# EAGLE board ebook-reader_v54 (EAGLE 9.7.0)
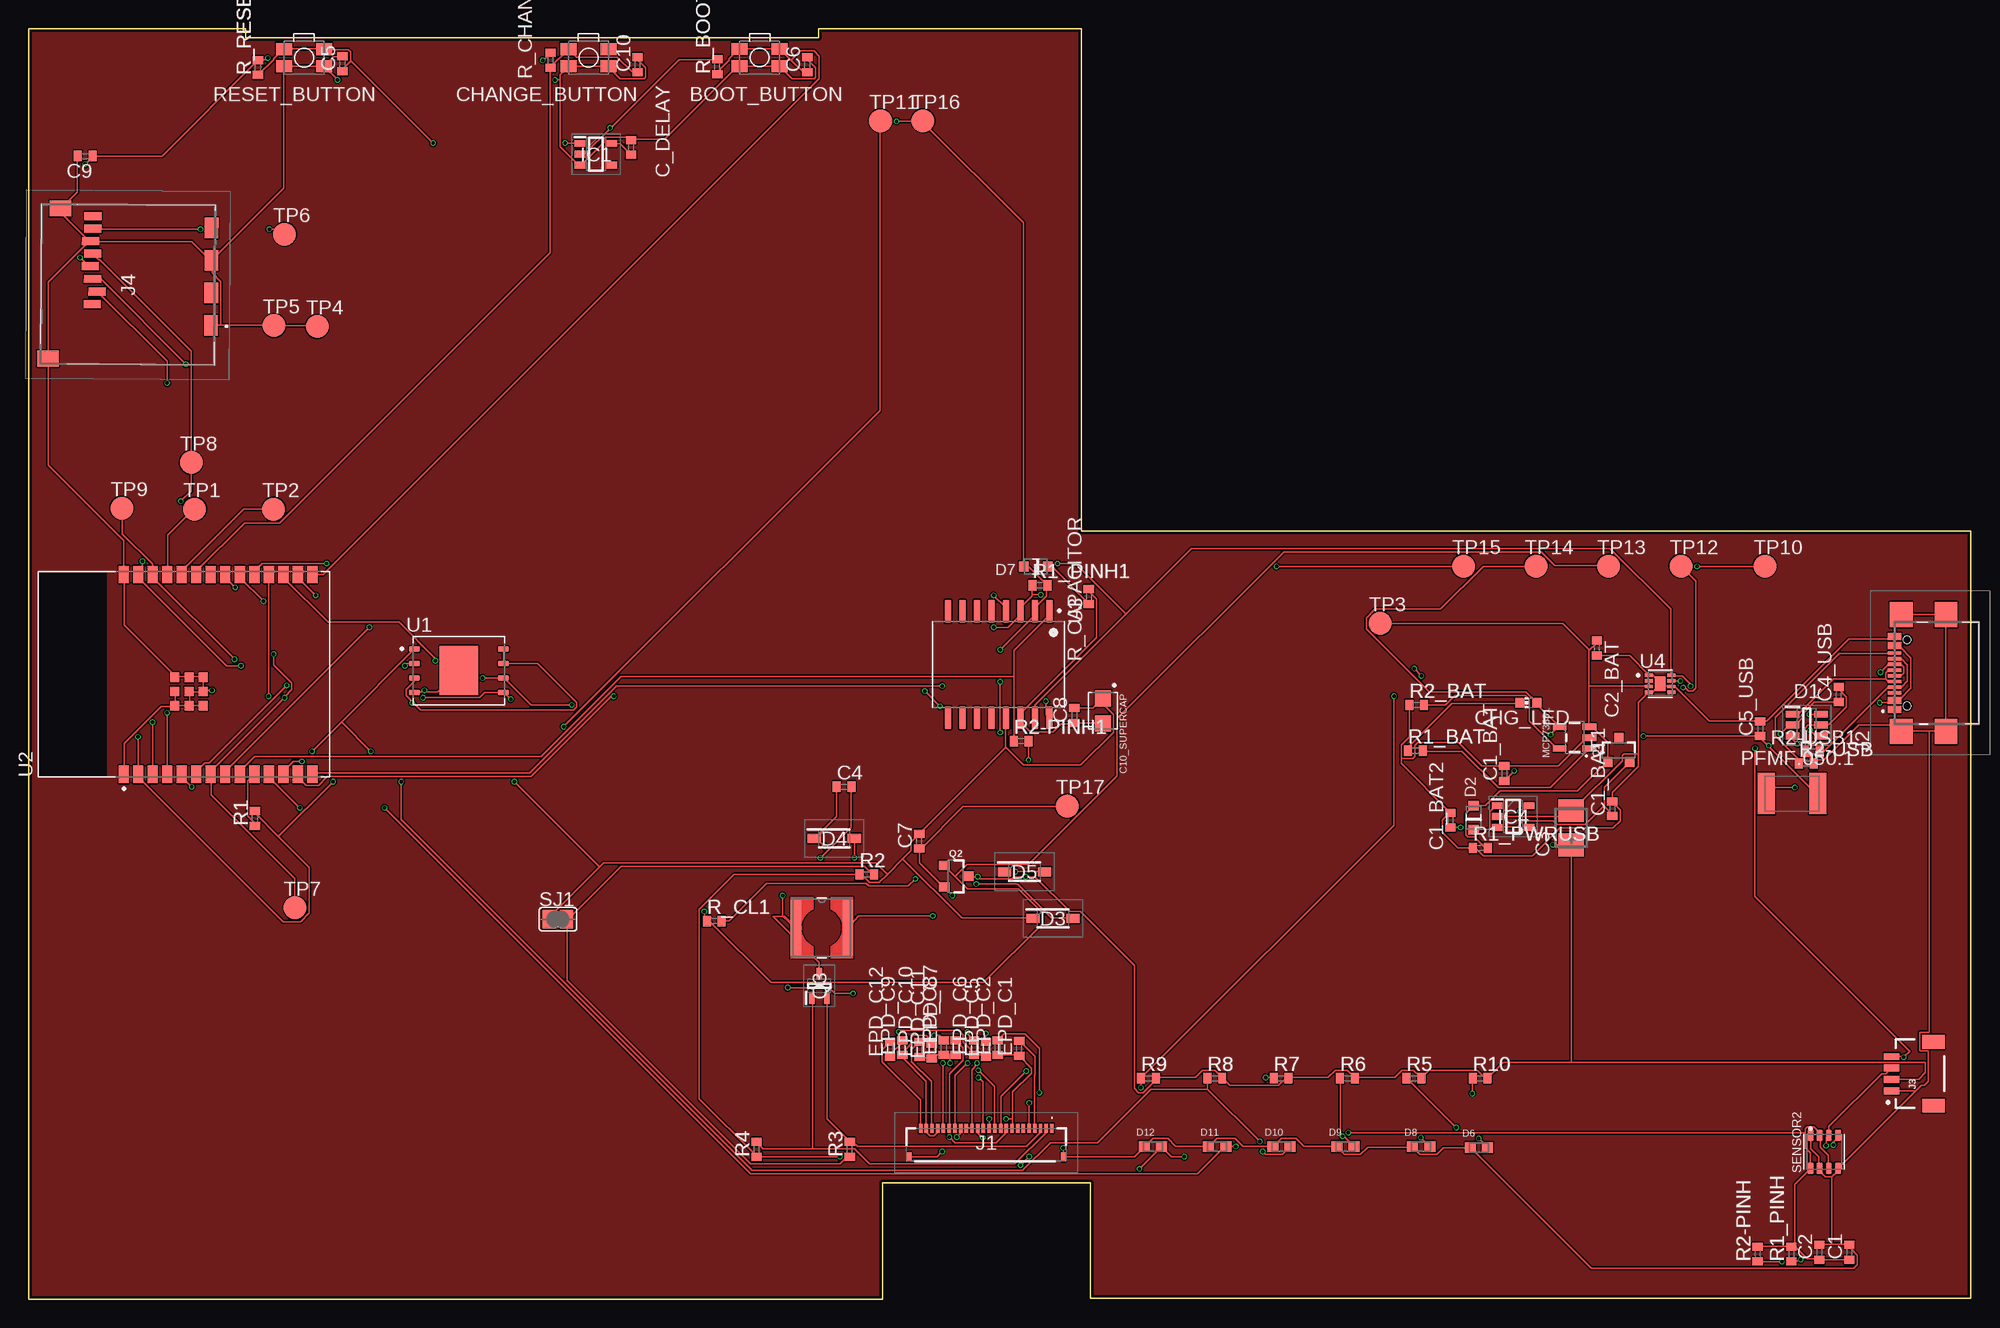
[diagram p0: board, top side]
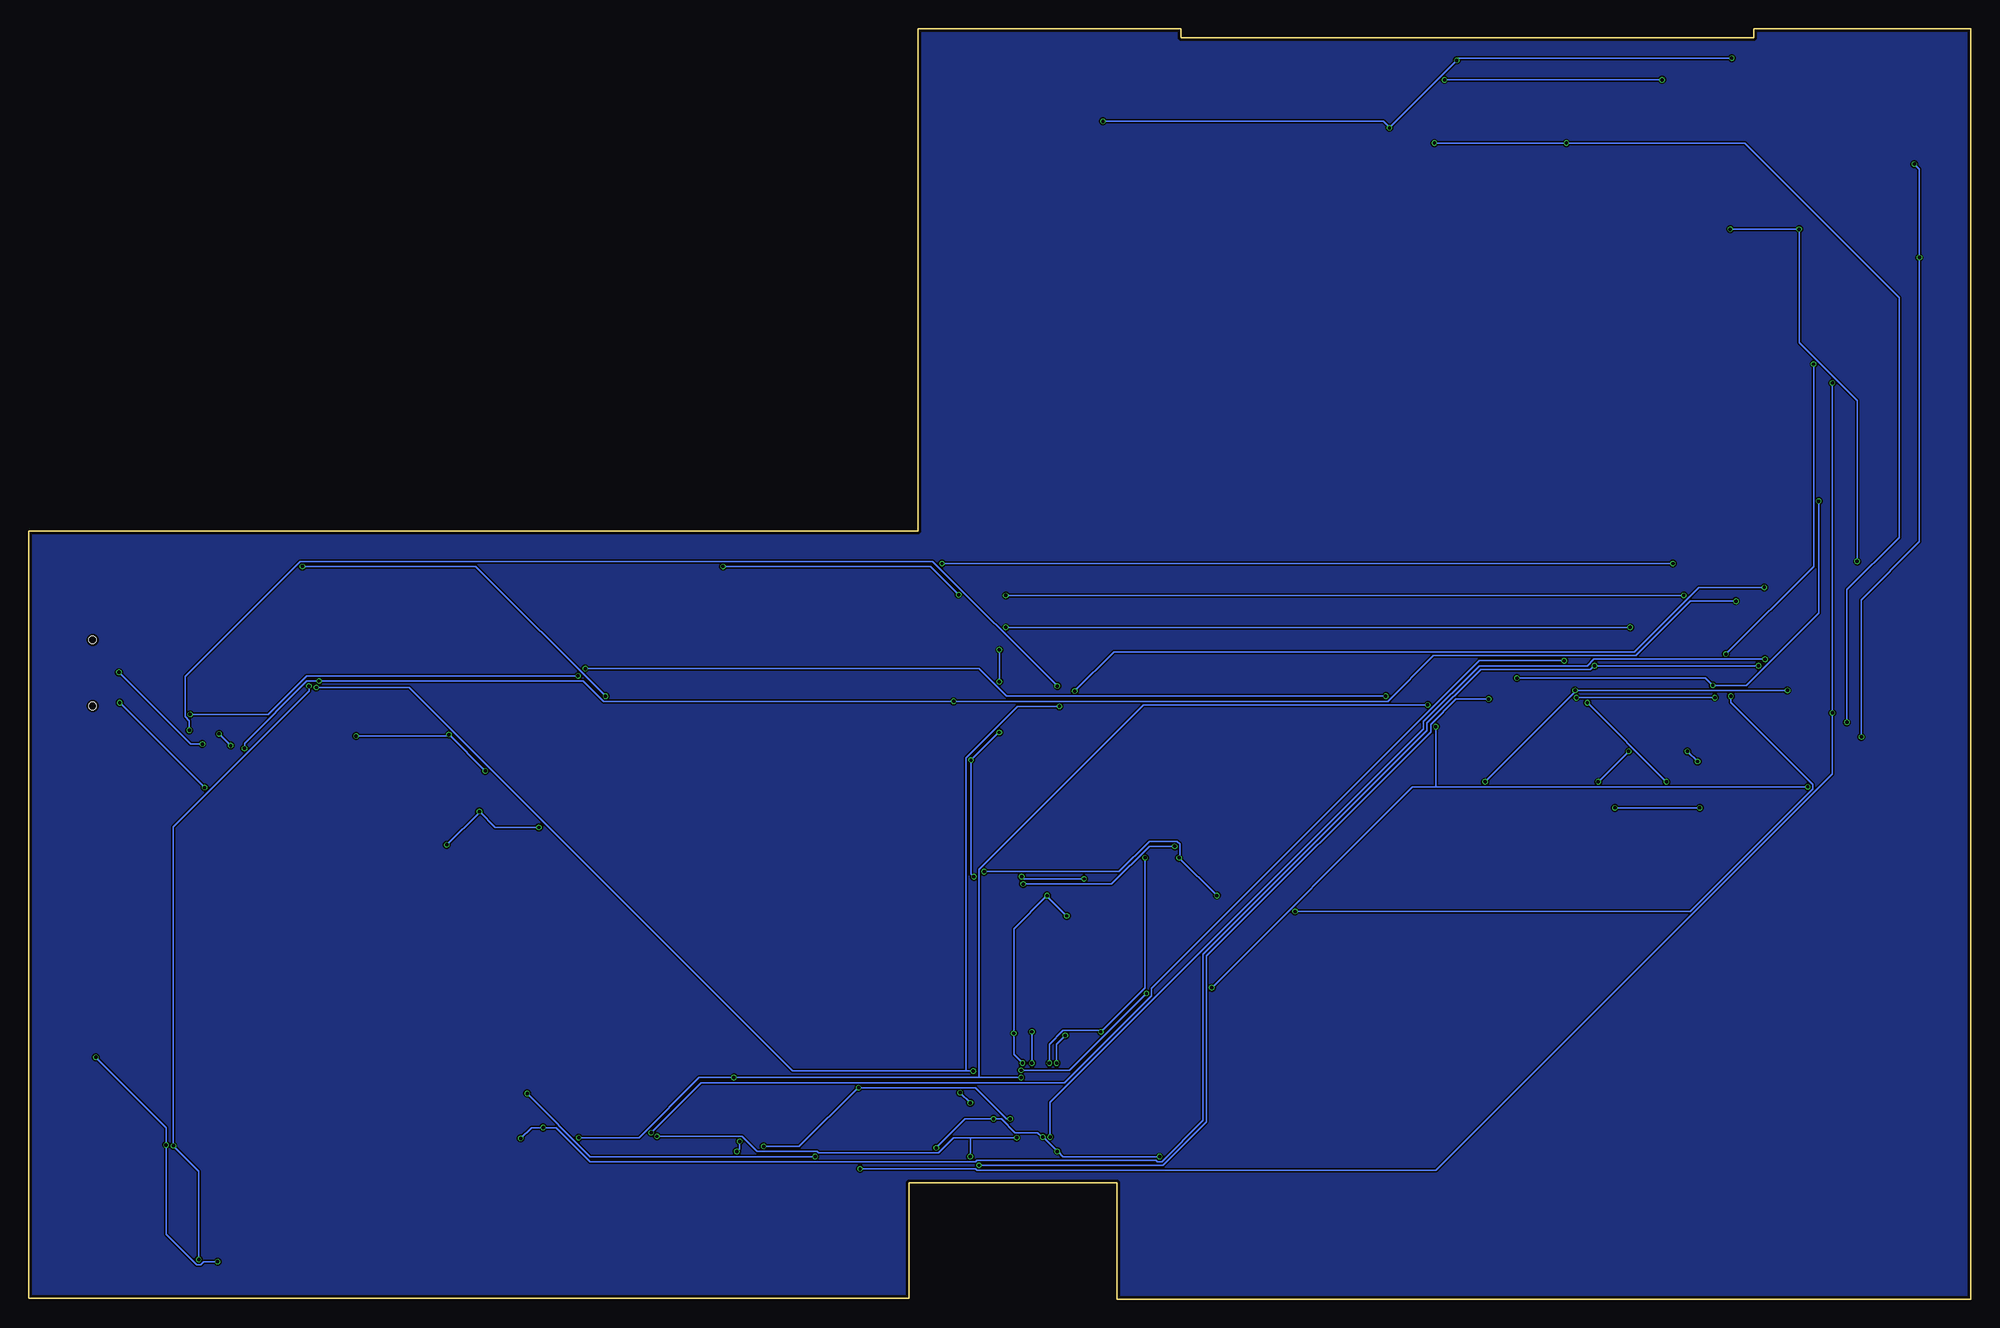
[diagram p1: board, bottom side, seen from below]

Size 170.1 x 111.3 mm. Coordinates in mm from the lower left corner, seen from the top.
Outline: 0,111.3 0,0 74.8,0 74.8,10.2 93,10.2 93,0.1 170.1,0.1 170.1,67.3 92.2,67.3 92.2,111.3 69.2,111.3 69.2,110.5 19.01,110.5 19.01,111.3 0,111.3
Copper layers (1*16): Top 0.035mm / dielectric 1.6mm / Bottom 0.035mm
Design rules "jlcpcb-2layers.dru": minimum track width 5mil, minimum drill 0.3mm, track to track 5mil, track to pad 5mil, pad to pad 5mil, via to via 5mil, smd to smd 5mil, copper to edge 0.2mm, drill to drill 6mil, minimum pad ring 10mil, minimum via ring 3mil, stop-mask expansion 4mil, vias tented up to drill 0mil, thermal gap 10mil
Net classes: 1 Power: width 0.3 mm; 2 Rest: width 0.15 mm

## Footprints (pad centres in the part's own frame; a part is rotated, then mirrored left to right if it is on the bottom)
MYBUTTON = smd 1.4 x 1.05: 1 1.75,0.75; 2 -1.75,0.75; 3 -1.75,-0.75; 4 1.75,-0.75
EAGLE-LTSPICE_C0402 = smd 0.7 x 0.9: 1 -0.65,0; 2 0.65,0
RCL_CT3528 = smd 2 x 2.2: + -1.5,0; - 1.5,0
CAPCP3225X100N = smd 1.4 x 1.4: 1 -1.1,0; 2 1.1,0
ADAFRUIT_CHIP-LED0603 = smd 0.8 x 0.8: A 0,-0.75; C 0,0.75
SOT95P280X145-6N = smd 1.2 x 0.6: 1 -1.25,0.95; 2 -1.25,0; 3 -1.25,-0.95; 4 1.25,-0.95; 5 1.25,0; 6 1.25,0.95
ESP32_WROVER_AVX---SD0805S020S1R0_AVX_SD0805S020S1R0_0 = smd 0.8 x 0.9: 1 -1.05,0; 2 1.05,0
SOD3716X135N = smd 1.15 x 0.8: 1 -1.75,0; 2 1.75,0
DIOC1608X36N = smd 0.97 x 0.94: 1 -0.75,0; 2 0.75,0
SOT95P280X125-5N = smd 0.9 x 0.6: 1 -1.4,0.95; 2 -1.4,0; 3 -1.4,-0.95; 4 1.4,-0.95; 5 1.4,0.95
SOT95P280X120-5N = smd 0.9 x 0.6: 1 -1.4,0.95; 2 -1.4,0; 3 -1.4,-0.95; 4 1.4,-0.95; 5 1.4,0.95
FH34SRJ24S05SH99 = smd 0.3 x 0.8: 1 5.75,1.45; 2 5.25,1.45; 3 4.75,1.45; 4 4.25,1.45; 5 3.75,1.45; 6 3.25,1.45; 7 2.75,1.45; 8 2.25,1.45; 9 1.75,1.45; 10 1.25,1.45; 11 0.75,1.45; 12 0.25,1.45; 13 -0.25,1.45; 14 -0.75,1.45; 15 -1.25,1.45; 16 -1.75,1.45; 17 -2.25,1.45; 18 -2.75,1.45; 19 -3.25,1.45; 20 -3.75,1.45; 21 -4.25,1.45; 22 -4.75,1.45; 23 -5.25,1.45; 24 -5.75,1.45 | smd 0.4 x 0.8: MP1 6.75,-1.05; MP2 -6.75,-1.05
SAMACSYS_PARTS_USB4110GFA = smd 0.3 x 1.15: A1 -3.35,3.678; A4 -2.55,3.678; A5 -1.25,3.678; A6 -0.25,3.678; A7 0.25,3.678; A8 1.25,3.678; A9 2.55,3.678; A12 3.35,3.678; B1 3.05,3.678; B4 2.25,3.678; B5 1.75,3.678; B6 0.75,3.678; B7 -0.75,3.678; B8 -1.75,3.678; B9 -2.25,3.678; B12 -3.05,3.678 | smd 2.18 x 2: MP1 -5.11,-0.827; MP2 5.11,-0.827; MP3 -5.11,3.103; MP4 5.11,3.103 | hole 0.65: -2.89,2.603; 2.89,2.603
JST04_1MM_RA = smd 0.6 x 1.35: 1 -1.5,0; 2 -0.5,0; 3 0.5,0; 4 1.5,0 | smd 1.2 x 2: NC1 2.8,-3.675; NC2 -2.8,-3.675
112ATAARR03ATTEND = smd 1.8 x 1.2: G1 10.6,10.4; G2 4.9,10.4; S1 7.75,10.4; S2 2.05,10.4 | smd 1.4 x 1.9: G3 13.6,-3.85; G4 0.45,-2.85 | smd 0.7 x 1.5: P1 8.8,0; P2 7.7,0.4; P3 6.6,0; P4 5.5,-0.2; P5 4.4,0; P6 3.3,-0.2; P7 2.2,0; P8 1.1,0
IND_4828-WE-TPC_WRE = smd 0.889 x 4.826: 1 -2.286,0; 2 2.286,0
ESP32_WROVER_SPARKFUN-IC-POWER_SOT23-5 = smd 0.55 x 1.2: 1 -0.95,-1.3; 2 0,-1.3; 3 0.95,-1.3; 4 0.95,1.3; 5 -0.95,1.3
ESP32C6_VARISTOR_CT/CN1812 = smd 1.5 x 3.6: 1 -2.25,0; 2 2.25,0
ESP32_WROVER_SPARKFUN-DISCRETESEMI_SOT23-3 = smd 0.8 x 0.9: 1 -0.95,-1; 2 0.95,-1; 3 0,1.1
SOT65P210X110-3N = smd 1.05 x 0.5: 1 -1.05,0.65; 2 -1.05,-0.65; 3 1.05,0
ESP32_WROVER_EAGLE-LTSPICE_R0402 = smd 0.7 x 0.9: 1 -0.65,0; 2 0.65,0
ESP32_WROVER_BME680_PSON80P300X300X100-8N = smd 1.016 x 0.5: 1 1.458,1.2; 2 1.458,0.4; 3 1.458,-0.4; 4 1.458,-1.2; 5 -1.458,-1.22; 6 -1.458,-0.4; 7 -1.458,0.4; 8 -1.458,1.2
SJ = smd 1.168 x 1.6: 1 -0.762,0; 2 0.762,0
TP20R = smd 2 x 2: TP 0,0
SON127P600X800X80-9N = smd 0.94 x 0.44: 1 -3.895,1.905; 2 -3.895,0.635; 3 -3.895,-0.635; 4 -3.895,-1.905; 5 3.895,-1.905; 6 3.895,-0.635; 7 3.895,0.635; 8 3.895,1.905 | smd 3.4 x 4.3: 9 0,0
XCVR_ESP32-C6-WROOM-1-N8 = smd 1.5 x 0.9: 1 -8.75,5.26; 2 -8.75,3.99; 3 -8.75,2.72; 4 -8.75,1.45; 5 -8.75,0.18; 6 -8.75,-1.09; 7 -8.75,-2.36; 8 -8.75,-3.63; 9 -8.75,-4.9; 10 -8.75,-6.17; 11 -8.75,-7.44; 12 -8.75,-8.71; 13 -8.75,-9.98; 14 -8.75,-11.25; 15 8.75,-11.25; 16 8.75,-9.98; 17 8.75,-8.71; 18 8.75,-7.44; 19 8.75,-6.17; 20 8.75,-4.9; 21 8.75,-3.63; 22 8.75,-2.36; 23 8.75,-1.09; 24 8.75,0.18; 25 8.75,1.45; 26 8.75,2.72; 27 8.75,3.99; 28 8.75,5.26 | smd 0.8 x 0.8: 29_1 -2.755,0.79; 29_2 -1.505,0.79; 29_3 -0.255,0.79; 29_4 -2.755,-0.46; 29_5 -1.505,-0.46; 29_6 -0.255,-0.46; 29_7 -2.755,-1.71; 29_8 -1.505,-1.71; 29_9 -0.255,-1.71
SOIC127P1032X265-16N = smd 2.05 x 0.59: 1 -4.655,4.445; 2 -4.655,3.175; 3 -4.655,1.905; 4 -4.655,0.635; 5 -4.655,-0.635; 6 -4.655,-1.905; 7 -4.655,-3.175; 8 -4.655,-4.445; 9 4.655,-4.445; 10 4.655,-3.175; 11 4.655,-1.905; 12 4.655,-0.635; 13 4.655,0.635; 14 4.655,1.905; 15 4.655,3.175; 16 4.655,4.445
SON50P200X200X80-9N = smd 0.76 x 0.27: 1 -0.985,0.75; 2 -0.985,0.25; 3 -0.985,-0.25; 4 -0.985,-0.75; 5 0.985,-0.75; 6 0.985,-0.25; 7 0.985,0.25; 8 0.985,0.75 | smd 0.9 x 1.3: 9 0,0

## Placement (x,y rotation side)
BOOT_BUTTON  BUTTON_CUSYOMV1  [MYBUTTON]  64.02,108.76 180 top
C1  100nF  [EAGLE-LTSPICE_C0402]  159.44,4.13 90 top
C1_BAT  4.7uF  [EAGLE-LTSPICE_C0402]  129.23,46.05 90 top
C1_BAT1  4.7uF  [EAGLE-LTSPICE_C0402]  138.68,42.97 90 top
C1_BAT2  4.7uF  [EAGLE-LTSPICE_C0402]  124.52,41.97 90 top
C2  100nF  [EAGLE-LTSPICE_C0402]  156.82,4.13 90 top
C2_BAT  4.7uF  [EAGLE-LTSPICE_C0402]  137.34,57.05 270 top
C3  100uF  [RCL_CT3528]  135.09,41.3 90 top
C4  4.7uF/25V  [EAGLE-LTSPICE_C0402]  71.41,44.89 0 top
C4_USB  100nF  [EAGLE-LTSPICE_C0402]  158.53,52.97 90 top
C5  1uF  [EAGLE-LTSPICE_C0402]  27.49,108.21 90 top
C5_USB  4.7uF  [EAGLE-LTSPICE_C0402]  151.64,49.97 90 top
C6  100nF  [EAGLE-LTSPICE_C0402]  68.2,108.13 90 top
C7  10uF  [EAGLE-LTSPICE_C0402]  77.99,40.13 90 top
C8  100nF  [EAGLE-LTSPICE_C0402]  91.58,51.13 90 top
C9  100nF  [EAGLE-LTSPICE_C0402]  4.96,100.13 180 top
C10  100nF  [EAGLE-LTSPICE_C0402]  53.34,108.13 90 top
C10_SUPERCAP  CPH3225A  [CAPCP3225X100N]  94.09,51.54 270 top
C_DELAY  100nF  [EAGLE-LTSPICE_C0402]  52.77,100.89 90 top
CHANGE_BUTTON  BUTTON_CUSYOMV1  [MYBUTTON]  49.04,108.75 180 top
CHG_LED  [ADAFRUIT_CHIP-LED0603]  131.34,52.25 90 top
D1  USBLC6-2SC6Y  [SOT95P280X145-6N]  155.72,50.29 0 top
D2  ESP32_WROVER_AVX---SD0805S020S1R0_AVX_SD0805S020S1R0_0_0AVX_SD0805S020S1R0_0_0  [ESP32_WROVER_AVX---SD0805S020S1R0_AVX_SD0805S020S1R0_0]  126.55,42.18 90 top
D3  MBR0530  [SOD3716X135N]  89.72,33.37 0 top
D4  MBR0530  [SOD3716X135N]  70.56,40.37 0 top
D5  MBR0530  [SOD3716X135N]  87.22,37.45 0 top
D6  PGB1010603MR  [DIOC1608X36N]  127.02,13.29 0 top
D7  ESP32_WROVER_AVX---SD0805S020S1R0_AVX_SD0805S020S1R0_0_0AVX_SD0805S020S1R0_0_0  [ESP32_WROVER_AVX---SD0805S020S1R0_AVX_SD0805S020S1R0_0]  88.2,64.18 180 top
D8  PGB1010603MR  [DIOC1608X36N]  121.95,13.37 0 top
D9  PGB1010603MR  [DIOC1608X36N]  115.33,13.37 0 top
D10  PGB1010603MR  [DIOC1608X36N]  109.71,13.37 0 top
D11  PGB1010603MR  [DIOC1608X36N]  104.09,13.37 0 top
D12  PGB1010603MR  [DIOC1608X36N]  98.47,13.37 0 top
EPD_C1  1uF/50V  [EAGLE-LTSPICE_C0402]  86.75,21.97 90 top
EPD_C2  1uF/50V  [EAGLE-LTSPICE_C0402]  84.87,22.05 90 top
EPD_C5  0.1uF/50V  [EAGLE-LTSPICE_C0402]  83.84,21.89 90 top
EPD_C6  1uF/50V  [EAGLE-LTSPICE_C0402]  82.79,22.05 90 top
EPD_C7  1uF/50V  [EAGLE-LTSPICE_C0402]  81.2,22.05 90 top
EPD_C8  1uF/50V  [EAGLE-LTSPICE_C0402]  80.15,22.05 90 top
EPD_C9  1uF/50V  [EAGLE-LTSPICE_C0402]  76.5,22.05 90 top
EPD_C10  1uF/50V  [EAGLE-LTSPICE_C0402]  78.04,21.89 90 top
EPD_C11  1uF/50V  [EAGLE-LTSPICE_C0402]  79.09,21.74 90 top
EPD_C12  1uF/50V  [EAGLE-LTSPICE_C0402]  75.45,21.89 90 top
IC1  BD5229G-TR  [SOT95P280X125-5N]  49.69,100.29 0 top
IC4  XC6220A331MR-G  [SOT95P280X120-5N]  130.01,42.29 0 top
J1  FH34SRJ-24S-0.5SH_99_  [FH34SRJ24S05SH99]  83.87,13.54 0 top
J2  SAMACSYS_PARTS_USB4110-GF-A  [SAMACSYS_PARTS_USB4110GFA]  167.09,54.86 90 top
J3  QWIIC_RIGHT_ANGLE  [JST04_1MM_RA]  163.15,19.76 90 top
J4  112A-TAAR-R03_ATTEND  [112ATAARR03ATTEND]  5.65,95.97 269.6 top
L1  68uH  [IND_4828-WE-TPC_WRE]  69.47,32.55 0 top
MCP73831  ESP32_WROVER_SPARKFUN-IC-POWER_MCP73831  [ESP32_WROVER_SPARKFUN-IC-POWER_SOT23-5]  135.39,49.19 90 top
PFMF.050.1  ESP32C6_VARISTORCN1812  [ESP32C6_VARISTOR_CT/CN1812]  154.44,44.3 0 top
Q1  20V/4.2A/52mΩ/1.4W  [ESP32_WROVER_SPARKFUN-DISCRETESEMI_SOT23-3]  139.26,48.06 0 top
Q2  20V/4.2A/52mΩ/1.4W  [ESP32_WROVER_SPARKFUN-DISCRETESEMI_SOT23-3]  81.18,37.06 270 top
Q3  SI1308EDL-T1-GE3  [SOT65P210X110-3N]  69.25,27.45 90 top
R1  10K  [ESP32_WROVER_EAGLE-LTSPICE_R0402]  19.83,42.13 90 top
R1_BAT  200  [ESP32_WROVER_EAGLE-LTSPICE_R0402]  121.45,48.05 0 top
R1_PINH  10K  [ESP32_WROVER_EAGLE-LTSPICE_R0402]  154.36,3.97 90 top
R1_PINH1  10K  [ESP32_WROVER_EAGLE-LTSPICE_R0402]  88.56,62.54 0 top
R1_PWRUSB  100K  [ESP32_WROVER_EAGLE-LTSPICE_R0402]  127.15,39.54 0 top
R2  2.2  [ESP32_WROVER_EAGLE-LTSPICE_R0402]  73.41,37.21 0 top
R2-PINH  10K  [ESP32_WROVER_EAGLE-LTSPICE_R0402]  151.42,3.97 90 top
R2-PINH1  10K  [ESP32_WROVER_EAGLE-LTSPICE_R0402]  86.93,48.89 0 top
R2-USB  5K1  [ESP32_WROVER_EAGLE-LTSPICE_R0402]  155.68,46.94 0 top
R2-USB1  5k1  [ESP32_WROVER_EAGLE-LTSPICE_R0402]  156.2,47.97 0 top
R2_BAT  2K  [ESP32_WROVER_EAGLE-LTSPICE_R0402]  121.56,52.05 0 top
R3  0.47  [ESP32_WROVER_EAGLE-LTSPICE_R0402]  71.91,13.13 90 top
R4  10K  [ESP32_WROVER_EAGLE-LTSPICE_R0402]  63.75,13.13 90 top
R5  [ESP32_WROVER_EAGLE-LTSPICE_R0402]  121.31,19.37 0 top
R6  [ESP32_WROVER_EAGLE-LTSPICE_R0402]  115.5,19.37 0 top
R7  [ESP32_WROVER_EAGLE-LTSPICE_R0402]  109.69,19.37 0 top
R8  [ESP32_WROVER_EAGLE-LTSPICE_R0402]  103.88,19.37 0 top
R9  [ESP32_WROVER_EAGLE-LTSPICE_R0402]  98.07,19.37 0 top
R10  [ESP32_WROVER_EAGLE-LTSPICE_R0402]  127.12,19.37 0 top
R_BOOT  10K  [ESP32_WROVER_EAGLE-LTSPICE_R0402]  60.31,107.97 90 top
R_CAPACITOR  15  [ESP32_WROVER_EAGLE-LTSPICE_R0402]  92.85,61.54 90 top
R_CHANGE  10K  [ESP32_WROVER_EAGLE-LTSPICE_R0402]  45.72,108.54 90 top
R_CL1  10K  [ESP32_WROVER_EAGLE-LTSPICE_R0402]  60.06,33.13 0 top
R_RESET  10K  [ESP32_WROVER_EAGLE-LTSPICE_R0402]  20.09,107.89 90 top
RESET_BUTTON  BUTTON_CUSYOMV1  [MYBUTTON]  24.13,108.75 180 top
SENSOR2  ESP32_WROVER_BME680_BME680  [ESP32_WROVER_BME680_PSON80P300X300X100-8N]  157.25,12.92 90 top
SJ1  [SJ]  46.36,33.29 0 top
TP1  TPTP20R  [TP20R]  14.53,69.21 0 top
TP2  TPTP20R  [TP20R]  21.45,69.21 0 top
TP3  TPTP20R  [TP20R]  118.37,59.21 0 top
TP4  TPTP20R  [TP20R]  25.29,85.21 0 top
TP5  TPTP20R  [TP20R]  21.49,85.29 0 top
TP6  TPTP20R  [TP20R]  22.41,93.29 0 top
TP7  TPTP20R  [TP20R]  23.33,34.29 0 top
TP8  TPTP20R  [TP20R]  14.25,73.29 0 top
TP9  TPTP20R  [TP20R]  8.17,69.29 0 top
TP10  TPTP20R  [TP20R]  152.06,64.21 0 top
TP11  TPTP20R  [TP20R]  74.61,103.21 0 top
TP12  TPTP20R  [TP20R]  144.71,64.21 0 top
TP13  TPTP20R  [TP20R]  138.36,64.21 0 top
TP14  TPTP20R  [TP20R]  132.01,64.21 0 top
TP15  TPTP20R  [TP20R]  125.66,64.21 0 top
TP16  TPTP20R  [TP20R]  78.31,103.21 0 top
TP17  TPTP20R  [TP20R]  90.96,43.21 0 top
U1  W25Q512JVEIQ  [SON127P600X800X80-9N]  37.69,55.06 0 top
U2  ESP32-C6-WROOM-1-N8  [XCVR_ESP32-C6-WROOM-1-N8]  13.6,54.74 90 top
U3  DS3231SN#  [SOIC127P1032X265-16N]  84.95,55.6 270 top
U4  MAX17048G+T10  [SON50P200X200X80-9N]  142.88,53.92 0 top

## Library data of the parts
BOOT_BUTTON CHANGE_BUTTON CHG_LED PFMF.050.1 RESET_BUTTON SJ1 TP1-TP17 = DeskAssistant v19 v1
C1 C1_BAT C1_BAT1 C1_BAT2 C2 C2_BAT C4 C4_USB C5 C5_USB C6-C10 C_DELAY EPD_C1 EPD_C2 EPD_C5-EPD_C12 = DeskAssistant v19 v1; SPICEMODEL: NONE; SPICEPREFIX: C
C3 = DeskAssistant v19 v1; SPICEPREFIX: C
C10_SUPERCAP = DeskAssistant v19 v1; AVAILABILITY: Not in stock; CHECK_PRICES: https://www.snapeda.com/parts/CPH3225A/Seiko+Instruments/view-part/?ref=eda; DESCRIPTION: 11 mF (EDLC) Supercapacitor 3.3 V 1210 (3225 Metric) - -; MF: Seiko Instruments; MP: CPH3225A; PACKAGE: 1210 Seiko; PRICE: None; PURCHASE-URL: https://www.snapeda.com/api/url_track_click_mouser/?unipart_id=562593&manufacturer=Seiko Instruments&part_name=CPH3225A&search_term=None; SNAPEDA_LINK: https://www.snapeda.com/parts/CPH3225A/Seiko+Instruments/view-part/?ref=snap
D1 = DeskAssistant v19 v1; AVAILABILITY: In Stock; CHECK_PRICES: https://www.snapeda.com/parts/USBLC6-2SC6Y/STMicroelectronics/view-part/?ref=eda; DESCRIPTION: 17V Clamp 5A (8/20µs) Ipp Tvs Diode Surface Mount SOT-23-6; MF: STMicroelectronics; MP: USBLC6-2SC6Y; PACKAGE: SOT-23-6 STMicroelectronics; PRICE: None; SNAPEDA_LINK: https://www.snapeda.com/parts/USBLC6-2SC6Y/STMicroelectronics/view-part/?ref=snap
D2 D7 = DeskAssistant v19 v1; CENTROID_NOT_SPECIFIED: No; DATASHEET: http://datasheets.avx.com/schottky.pdf; DIGIKEY_DESCRIPTION: DIODE SCHOTTKY 20V 1A 0805; DIGIKEY_PART_NUMBER: 478-7800-1-ND; LEAD_FREE: yes; MF: AVX; MOUSER_PART_NUMBER: 581-SD0805S020S1R0; PACKAGE: 0805 (2012 metric); PREFIX: D; ROHS: yes; TEMPERATURE_RANGE_HIGH: +125°C; TEMPERATURE_RANGE_LOW: -55°C
D3-D5 = DeskAssistant v19 v1; AVAILABILITY: In Stock; CHECK_PRICES: https://www.snapeda.com/parts/MBR0530/Onsemi/view-part/?ref=eda; DESCRIPTION: Diode Schottky 30 V 500mA Surface Mount SOD-123; MF: ON Semiconductor; MP: MBR0530; PACKAGE: SOD-123-2 ON Semiconductor; PRICE: None; PURCHASE-URL: https://www.snapeda.com/api/url_track_click_mouser/?unipart_id=179458&manufacturer=ON Semiconductor&part_name=MBR0530&search_term=None; SNAPEDA_LINK: https://www.snapeda.com/parts/MBR0530/Onsemi/view-part/?ref=snap
D6 D8-D12 = DeskAssistant v19 v1; AVAILABILITY: In Stock; CHECK_PRICES: https://www.snapeda.com/parts/PGB1010603MR/Littelfuse/view-part/?ref=eda; DESCRIPTION: 150V (Typ) Clamp - Ipp Tvs Diode Surface Mount 0603 (1608 Metric); MF: Littelfuse Inc.; MP: PGB1010603MR; PACKAGE: 0603 Littelfuse Inc.; PRICE: None; PURCHASE-URL: https://www.snapeda.com/api/url_track_click_mouser/?unipart_id=5659453&manufacturer=Littelfuse Inc.&part_name=PGB1010603MR&search_term=None; SNAPEDA_LINK: https://www.snapeda.com/parts/PGB1010603MR/Littelfuse/view-part/?ref=snap
IC1 = DeskAssistant v19 v1; DESCRIPTION: Voltage Detector with Adjustable Delay Time: CMOS processes are utilized to develop high precision, low current consumption CMOS reset ICs that allow arbitrary setting of the delay time. The extensive lineup includes both Nch Open Drain and CMOS output types in a wide range of detection voltages (from 2.3V to 6.0V, in 0.1V steps), enabling selection of the ideal solution based on customer requirements. In addition, the entire series is of course both lead-free and RoHS-compliant.; HEIGHT: 1.25mm; MANUFACTURER_NAME: ROHM Semiconductor; MANUFACTURER_PART_NUMBER: BD5229G-TR; MOUSER_PART_NUMBER: 755-BD5229G-TR; MOUSER_PRICE-STOCK: https://www.mouser.co.uk/ProductDetail/ROHM-Semiconductor/BD5229G-TR?qs=4kLU8WoGk0vvnhrrYwdszw%3D%3D
IC4 = DeskAssistant v19 v1; DESCRIPTION: LDO Voltage Regulators; HEIGHT: 1.2mm; MANUFACTURER_NAME: Torex; MANUFACTURER_PART_NUMBER: XC6220A331MR-G; MOUSER_PART_NUMBER: 865-XC6220A331MR-G; MOUSER_PRICE-STOCK: https://www.mouser.co.uk/ProductDetail/Torex-Semiconductor/XC6220A331MR-G?qs=AsjdqWjXhJ8ZSWznL1J0gg%3D%3D
J1 = DeskAssistant v19 v1; DESCRIPTION: 24 Position FFC, FPC Connector Contacts, Top and Bottom 0.020" (0.50mm) Surface Mount, Right Angle; HEIGHT: 1.1mm; MANUFACTURER_NAME: Hirose; MANUFACTURER_PART_NUMBER: FH34SRJ-24S-0.5SH(99); MOUSER_PART_NUMBER: 798-FH34SRJ24S05SH99; MOUSER_PRICE-STOCK: https://www.mouser.co.uk/ProductDetail/Hirose-Connector/FH34SRJ-24S-0.5SH99?qs=vcbW%252B4%252BSTIpKBl5ap9J8Fw%3D%3D
J2 = DeskAssistant v19 v1; DESCRIPTION: CONN USB 2.0 TYPE-C R/A SMT; HEIGHT: 3.26mm; MANUFACTURER_NAME: GCT (GLOBAL CONNECTOR TECHNOLOGY); MANUFACTURER_PART_NUMBER: USB4110-GF-A; MOUSER_PART_NUMBER: 640-USB4110-GF-A; MOUSER_PRICE-STOCK: https://www.mouser.co.uk/ProductDetail/GCT/USB4110-GF-A?qs=KUoIvG%2F9IlYiZvIXQjyJeA%3D%3D
J3 = DeskAssistant v19 v1; PROD_ID: CONN-13694
J4 = DeskAssistant v19 v1; DESCRIPTION: Micro SD Card Socket, Push-Push Type, Top Mount, SMT, H=1.83mm, 10u; HEIGHT: 1.9mm; MANUFACTURER_NAME: ATTEND; MANUFACTURER_PART_NUMBER: 112A-TAAR-R03 ATTEND
L1 = DeskAssistant v19 v1; COPYRIGHT: Copyright (C) 2024 Ultra Librarian. All rights reserved.; MANUFACTURER_PART_NUMBER: 744043680; MFR_NAME: Wurth Electronics
MCP73831 = DeskAssistant v19 v1; PROD_ID: IC-09995
Q1 Q2 = DeskAssistant v19 v1; PROD_ID: TRAN-14388
Q3 = DeskAssistant v19 v1; AVAILABILITY: In Stock; CHECK_PRICES: https://www.snapeda.com/parts/SI1308EDL-T1-GE3/Vishay+Siliconix/view-part/?ref=eda; DESCRIPTION: Si1308EDL-T1-GE3 N-channel MOSFET Transistor, 1.5 A, 30 V, 3-Pin SC-70 | Siliconix / Vishay SI1308EDL-T1-GE3; MF: Vishay Siliconix; MP: SI1308EDL-T1-GE3; PACKAGE: SOT-323 Vishay Semiconductor; PRICE: None; PURCHASE-URL: https://www.snapeda.com/api/url_track_click_mouser/?unipart_id=274603&manufacturer=Vishay Siliconix&part_name=SI1308EDL-T1-GE3&search_term=None; SNAPEDA_LINK: https://www.snapeda.com/parts/SI1308EDL-T1-GE3/Vishay+Siliconix/view-part/?ref=snap
R1 R1_BAT R1_PINH R1_PINH1 R1_PWRUSB R2 R2-PINH R2-PINH1 R2-USB R2-USB1 R2_BAT R3-R10 R_BOOT R_CAPACITOR R_CHANGE R_CL1 R_RESET = DeskAssistant v19 v1; SPICEMODEL: NONE; SPICEPREFIX: R
SENSOR2 = DeskAssistant v19 v1; AVAILABILITY: Unavailable; DESCRIPTION: Integrated Environmental Unit; MF: Bosch Sensortec; MP: BME680; PACKAGE: LGA-8 Bosch Tools; PRICE: None
U1 = DeskAssistant v19 v1; AVAILABILITY: In Stock; CHECK_PRICES: https://www.snapeda.com/parts/W25Q512JVEIQ/Winbond+Electronics/view-part/?ref=eda; DESCRIPTION: FLASH - NOR Memory IC 512Mb (64M x 8) SPI - Quad I/O 133 MHz 8-WSON (8x6); MF: Winbond Electronics; MP: W25Q512JVEIQ; PACKAGE: Package; PRICE: None; SNAPEDA_LINK: https://www.snapeda.com/parts/W25Q512JVEIQ/Winbond+Electronics/view-part/?ref=snap
U2 = DeskAssistant v19 v1; AVAILABILITY: In Stock; CHECK_PRICES: https://www.snapeda.com/parts/ESP32-C6-WROOM-1-N8/Espressif+Systems/view-part/?ref=eda; DESCRIPTION: Multiprotocol Modules ESP32-C6 module, Wi-Fi 6 in 2.4 GHz band, Bluetooth 5, Zigbee 3.0 and Thread. ESP34-WROOM Compatible - ENGINEERING SAMPLE; MF: Espressif Systems; MP: ESP32-C6-WROOM-1-N8; PACKAGE: None; PRICE: None; SNAPEDA_LINK: https://www.snapeda.com/parts/ESP32-C6-WROOM-1-N8/Espressif+Systems/view-part/?ref=snap
U3 = DeskAssistant v19 v1; AVAILABILITY: In Stock; CHECK_PRICES: https://www.snapeda.com/parts/DS3231SN%23/Analog+Devices/view-part/?ref=eda; DESCRIPTION: Extremely Accurate I²C-Integrated RTC/TCXO/Crystal; MF: Analog Devices; MP: DS3231SN#; PACKAGE: SOIC-16 Maxim; PRICE: None; PURCHASE-URL: https://www.snapeda.com/api/url_track_click_mouser/?unipart_id=99048&manufacturer=Analog Devices&part_name=DS3231SN#&search_term=None; SNAPEDA_LINK: https://www.snapeda.com/parts/DS3231SN%23/Analog+Devices/view-part/?ref=snap
U4 = DeskAssistant v19 v1; AVAILABILITY: In Stock; CHECK_PRICES: https://www.snapeda.com/parts/MAX17048G+T10/Analog+Devices/view-part/?ref=eda; DESCRIPTION: 3µA 1-Cell/2-Cell Fuel Gauge with ModelGauge; MF: Analog Devices; MP: MAX17048G+T10; PACKAGE: TDFN-8 Maxim; PRICE: None; PURCHASE-URL: https://www.snapeda.com/api/url_track_click_mouser/?unipart_id=329239&manufacturer=Analog Devices&part_name=MAX17048G+T10&search_term=None; SNAPEDA_LINK: https://www.snapeda.com/parts/MAX17048G+T10/Analog+Devices/view-part/?ref=snap

## Nets
3V3: C1_BAT2.1 C3.+ C9.1 D7.2 IC1.2 IC4.5 J3.2 J4.P4 Q2.3 R1.2 R1_PINH1.2 R2-PINH1.2 R5.2 R6.2 R7.2 R8.2 R9.2 R10.2 R_BOOT.2 R_CHANGE.2 R_CL1.2 R_RESET.2 TP16.TP U1.3 U1.7 U1.8 U2.2 U3.2
32KHZ [Rest]: R2-PINH1.1 U2.9 U3.1
DN [Rest]: D1.1 J2.A7 J2.B7
DP [Rest]: D1.3 J2.A6 J2.B6
EPD_3V3: C7.1 EPD_C5.2 J1.15 J1.16 L1.2 Q2.2 TP17.TP
EPD_3V3_C: Q2.1 R_CL1.1 TP13.TP U2.18
EPD_BUSY [Rest]: J1.9 TP9.TP U2.26
EPD_CS [Rest]: D11.2 J1.12 R9.1 TP10.TP U2.11
EPD_DC [Rest]: J1.11 TP11.TP U2.5
EPD_RST [Rest]: J1.10 TP12.TP U2.21
FLASH_CS [Rest]: D10.2 R8.1 U1.1 U2.12
GDR [Rest]: J1.2 Q3.1 R4.2
GND [Rest]: BOOT_BUTTON.1 BOOT_BUTTON.2 C1.2 C1_BAT1.2 C1_BAT2.2 C1_BAT.2 C2.2 C2_BAT.2 C3.- C4_USB.2 C5.2 C5_USB.2 C6.2 C7.2 C8.2 C9.2 C10.2 C10_SUPERCAP.1 C_DELAY.2 CHANGE_BUTTON.1 CHANGE_BUTTON.2 D1.5 D3.1 D6.1 D8.1 D9.1 D10.1 D11.1 D12.1 EPD_C1.1 EPD_C2.1 IC1.3 IC4.2 J1.8 J1.17 J1.MP1 J1.MP2 J2.A1 J2.A12 J2.B1 J2.B12 J2.MP1 J2.MP2 J2.MP3 J2.MP4 J3.1 J4.G1 J4.G2 J4.G3 J4.G4 J4.P6 MCP73831.2 R1_PWRUSB.1 R2-USB1.1 R2-USB.2 R2.1 R2_BAT.1 R4.1 RESET_BUTTON.1 RESET_BUTTON.2 SENSOR2.1 SENSOR2.5 SENSOR2.7 SJ1.1 TP4.TP TP5.TP U1.4 U1.9 U2.1 U2.28 U2.29_1 U2.29_2 U2.29_3 U2.29_4 U2.29_5 U2.29_6 U2.29_7 U2.29_8 U2.29_9 U3.13 U4.1 U4.4 U4.6 U4.9
I2C_PW [Rest]: C1.1 C2.1 R1_PINH.2 R2-PINH.2 SENSOR2.2 SENSOR2.6 SENSOR2.8 U2.17
INT_RTC [Rest]: R1_PINH1.1 TP15.TP U2.8 U3.3
IO/BOOT [Rest]: BOOT_BUTTON.3 BOOT_BUTTON.4 C6.1 R_BOOT.1 U2.15
IO/CHANGE [Rest]: C10.1 CHANGE_BUTTON.4 R_CHANGE.1 U2.23
MISO [Rest]: D6.2 J4.P7 R5.1 TP6.TP U1.2 U2.27
MOSI [Rest]: D9.2 J1.14 J4.P3 R6.1 TP7.TP U1.5 U2.7
N$1 [Rest]: J2.A5 J2.A8 R2-USB1.2
N$2 [Rest]: J2.B5 R2-USB.1
N$3 [Rest]: R1.1 U2.10
N$4 [Rest]: Q1.3
N$5 [Rest]: C1_BAT1.1 D2.1 IC4.1 IC4.3 Q1.2
N$7 [Rest]: CHG_LED.C R1_BAT.1
N$8 [Rest]: C4.1 D3.2 D4.1
N$9 [Rest]: MCP73831.1 R1_BAT.2
N$10 [Rest]: MCP73831.5 R2_BAT.2
N$11 [Rest]: EPD_C1.2 J1.4
N$12 [Rest]: EPD_C2.2 J1.5
N$13 [Rest]: C_DELAY.1 IC1.5
N$14 [Rest]: D7.1 R_CAPACITOR.1
N$15 [Rest]: EPD_C12.2 J1.24
N$16 [Rest]: EPD_C10.2 J1.22
N$17 [Rest]: EPD_C9.1 EPD_C11.2 J1.21 J1.23
N$18 [Rest]: EPD_C8.2 J1.20
N$19 [Rest]: EPD_C7.2 J1.19
N$20 [Rest]: EPD_C6.2 J1.18
PREVGH [Rest]: D5.1
PREVGL [Rest]: D4.2 EPD_C5.1 EPD_C6.1 EPD_C7.1 EPD_C8.1 EPD_C9.2 EPD_C10.1 EPD_C11.1 EPD_C12.1
RESE [Rest]: J1.3 Q3.2 R3.2
RESE' [Rest]: R2.2 R3.1 SJ1.2
RESET [Rest]: C5.1 IC1.1 R_RESET.1 RESET_BUTTON.3 RESET_BUTTON.4 U2.3
RTC_RST [Rest]: U2.16 U3.4
RX [Rest]: TP2.TP U2.24
SCK [Rest]: D8.2 J1.13 J4.P5 R7.1 TP8.TP U1.6 U2.6
SCL [Rest]: J3.4 R2-PINH.1 SENSOR2.4 U2.20 U3.16 U4.7
SDA [Rest]: J3.3 R1_PINH.1 SENSOR2.3 U2.19 U3.15 U4.8
SRC [Rest]: C4.2 D5.2 L1.1 Q3.3
SS_SD [Rest]: D12.2 J4.P2 R10.1 U2.4
TX [Rest]: TP1.TP U2.25
USB_D+ [Rest]: D1.4 U2.14
USB_D- [Rest]: D1.6 U2.13
VBAT: C2_BAT.1 D2.2 MCP73831.3 Q1.1 R1_PWRUSB.2 TP3.TP U4.2 U4.3
VBUS: C1_BAT.1 C4_USB.1 C5_USB.1 CHG_LED.A D1.2 MCP73831.4 PFMF.050.1.2 TP14.TP
VRTC [Rest]: C8.1 C10_SUPERCAP.2 R_CAPACITOR.2 U3.14
VUSB: J2.A4 J2.A9 J2.B4 J2.B9 PFMF.050.1.1

## Tracks (layer width: path | path; a pad name or v marks a point on that pad's centre or on a via)
3V3  (via drill 0.3)
  Top 0.127: v77.66,36.82 77.03,36.19 73.6,36.19 73.34,36.44 64.64,36.44 61.34,33.14 60.77,33.14 R_CL1.2 | Q2.3 82.3,37.01 v83.12,37.01 83.31,36.82 86.11,36.82 86.3,37.01 v87.31,37.01 88.14,37.01 91.19,33.97 92.14,33.97 96.84,29.27 96.84,18.47 97.22,18.09 97.6,18.09 98.68,19.17 98.68,19.36 R9.2 98.74,19.42 102.17,19.42 102.81,20.06 103.89,20.06 104.52,19.42 R8.2 104.58,19.36 105.22,18.72 109.47,18.72 110.11,19.36 110.3,19.36 R7.2 110.36,19.42 113.79,19.42 114.43,20.06 115.51,20.06 116.14,19.42 R6.2 116.2,19.42 119.63,19.42 120.27,20.06 121.28,20.06 121.92,19.42 R5.2 121.98,19.42 122.62,20.06 126.87,20.06 127.51,19.42 127.76,19.42 R10.2 127.83,19.42 129.16,20.76 135.13,20.76 | v87.57,47.24 87.57,48.89 R2-PINH1.2 | v125.41,41.33 124.52,41.33 C1_BAT2.1 | v130.62,42.73 130.87,42.73 131.38,43.24 IC4.5 | 135.13,20.76 166.05,20.76 166.12,20.69 166.12,19.87 165.51,19.26 J3.2 | 135.13,20.76 135.13,39.74 C3.+ 135.06,39.81 v133.48,39.81 | 33.69,52.28 34.35,51.62 47.75,51.62 48.01,51.87 48.01,52.25 44.58,55.68 41.59,55.68 U1.7 41.59,55.74 41.59,56.95 U1.8 | 33.69,52.28 33.08,52.89 33.08,53.4 33.78,54.09 33.78,54.41 U1.3 | 21.88,40.54 24.57,37.84 24.57,33.84 23.81,33.08 22.29,33.08 9.65,45.71 9.65,45.97 U2.2 9.59,46.03 v9.59,49.27 | 21.88,40.54 19.88,42.54 19.88,42.73 R1.2 | v33.59,52.25 33.66,52.25 33.69,52.28 | 21.88,40.54 v26.67,45.33 | v4.51,91.24 5.27,90.48 5.4,90.48 J4.P4 | v4.95,99.43 5.59,100.07 C9.1 5.65,100.13 11.68,100.13 20.07,108.51 R_RESET.2 20.13,108.58 20.83,108.58 v20.95,108.7 | 50.96,102.58 56.96,108.58 60.26,108.58 R_BOOT.2 | 50.96,102.58 48.7,100.32 48.32,100.32 IC1.2
  Top 0.127: v45.02,108.51 45.09,108.51 45.72,109.15 R_CHANGE.2 | v50.93,102.61 50.96,102.58 | v76.01,103.18 78.3,103.18 TP16.TP 78.3,103.12 87.12,94.29 87.12,64.19 D7.2 87.19,64.13 87.63,64.13 89.15,62.6 R1_PINH1.2 89.15,62.54 89.15,61.59 88.14,60.57 88.14,60.32 U3.2 88.14,60.19 88.14,59.94 v85.09,56.89 | v85.09,54.09 v85.09,49.65
  Bottom 0.127: v77.66,36.82 82.93,36.82 v83.12,37.01 | v87.31,37.01 87.57,37.27 v87.57,47.24 85.15,49.65 v85.09,49.65 | v125.41,41.33 129.22,41.33 v130.62,42.73 130.62,42.66 v133.48,39.81 | v26.67,45.33 v33.59,52.25 | v4.95,99.43 4.51,98.99 v4.51,91.24 4.51,66.35 9.59,61.27 v9.59,49.27 | v76.01,103.18 51.44,103.18 50.93,102.67 v50.93,102.61 v45.02,108.51 44.83,108.7 v20.95,108.7 | v85.09,56.89 v85.09,54.09
32KHZ
  Top 0.15: 86.3,54.54 86.3,56.83 89.34,59.87 89.34,60.25 U3.1 | 86.3,54.54 86.3,48.95 R2-PINH1.1 | 86.3,54.54 51.88,54.54 44.9,47.55 19.81,47.55 18.54,46.28 18.54,46.03 U2.9
DN
  Top 0.15: 162.62,54.35 162.81,54.16 163.39,54.16 J2.B7 | 162.62,54.35 162.62,54.86 162.88,55.11 J2.A7 | 162.62,54.35 158.05,54.35 155,51.3 154.5,51.3 D1.1
DP  (via drill 0.3)
  Top 0.15: J2.A6 163.45,54.67 164.02,54.67 164.21,54.86 164.21,55.36 164.02,55.55 163.45,55.55 J2.B6 163.39,55.55 162.81,55.55 v162.18,54.92 | v154.88,48.63 154.5,49.01 154.5,49.33 D1.3
  Bottom 0.15: v154.88,48.63 155.89,48.63 v162.18,54.92
EPD_3V3  (via drill 0.3)
  Top 0.127: J1.16 82.17,15.04 82.61,15.04 J1.15 82.61,15.11 82.61,20.12 83.06,20.57 v83.06,20.69 | v83.82,23.3 83.82,22.6 EPD_C5.2 | TP17.TP 90.93,43.17 81.85,43.17 78.11,39.42 C7.1 78.04,39.42 78.04,38.22 80.14,36.12 Q2.2 80.2,36.06 v80.9,35.36 | v79.18,33.58 72.7,33.58 L1.2
  Bottom 0.127: v83.06,20.69 83.82,21.45 v83.82,23.3 83.82,32.44 v80.9,35.36 80.9,35.3 v79.18,33.58
EPD_3V3_C  (via drill 0.3)
  Top 0.127: 81.12,37.04 80.2,37.97 Q2.1 | 81.12,37.04 82.23,35.93 86.68,35.93 88.77,33.84 88.77,32.88 83.63,27.74 65.02,27.74 59.69,33.08 59.44,33.08 R_CL1.1 59.37,33.14 59.18,33.33 v59.18,33.97 | v21.02,52.82 21.02,63.43 U2.18 | 81.12,37.04 82.17,38.09 87.57,38.09 95.31,45.84 95.31,50.85 109.92,65.46 132.46,65.46 133.67,64.25 138.3,64.25 TP13.TP
  Bottom 0.127: v21.02,52.82 21.02,52.25 13.84,45.08 13.84,44.7 24.57,33.97 v59.18,33.97
EPD_BUSY  (via drill 0.3)
  Top 0.15: v80.64,14.22 81.15,13.71 84.71,13.71 85.6,14.6 85.6,14.98 J1.9 | v18.03,56.06 10.92,63.17 10.92,63.43 U2.26 10.86,63.56 10.86,64.38 8.19,67.05 8.19,69.27 TP9.TP
  Bottom 0.15: v80.64,14.22 80.64,17.26 47.94,49.97 47.94,50.6 43.05,55.49 33.59,55.49 33.02,56.06 v18.03,56.06
EPD_CS  (via drill 0.3)
  Top 0.15: v84.14,15.8 84.14,15.04 J1.12 | v97.41,18.53 R9.1 97.47,19.42 119.57,41.52 v119.57,52.82 | v105.73,13.39 104.9,13.39 D11.2 104.78,13.39 102.36,10.98 63.25,10.98 v31.18,43.05 | v23.75,43.05 21.08,45.71 21.08,45.97 U2.11 | v146.11,64.19 152.02,64.19 TP10.TP
  Bottom 0.15: v84.14,15.8 84.45,15.8 87.19,18.53 v97.41,18.53 97.47,18.53 102.62,13.39 v105.73,13.39 | v31.18,43.05 v23.75,43.05 | v146.11,64.19 130.94,64.19 v119.57,52.82
EPD_DC  (via drill 0.3)
  Top 0.15: v83.19,20.06 84.58,18.66 84.58,15.04 J1.11 | v72.2,26.79 70.61,26.79 70.1,27.3 v66.48,27.3 | v14.29,44.89 13.46,45.71 13.46,45.97 U2.5 | v46.86,50.16 74.55,77.84 74.55,103.18 TP11.TP
  Bottom 0.15: v83.19,20.06 78.93,20.06 v72.2,26.79 | v66.48,27.3 48.9,44.89 46.86,44.89 | v14.29,44.89 46.86,44.89 | 46.86,44.89 v46.86,50.16
EPD_RST  (via drill 0.3)
  Top 0.15: v87.38,19.99 85.15,17.77 85.15,15.04 J1.10 | v144.91,53.59 145.03,53.59 145.35,53.27 145.73,53.27 145.99,53.52 145.99,62.92 144.72,64.19 TP12.TP | v18.1,62.35 17.27,63.17 17.27,63.43 U2.21 | v79.82,51.94 v78.49,53.27
  Bottom 0.15: 88.01,19.99 103.19,19.99 136.78,53.59 v144.91,53.59 | 88.01,19.99 v87.38,19.99 | v18.1,62.35 23.81,62.35 29.46,56.7 75.06,56.7 v78.49,53.27 | v79.82,51.94 83.5,51.94 88.01,47.43 88.01,19.99
FLASH_CS  (via drill 0.3)
  Top 0.15: 103.25,18.41 103.25,19.36 R8.1 | v107.82,13.84 103.25,18.41 | v108.08,12.95 108.33,12.69 109.79,12.69 110.43,13.33 D10.2 | v24.83,48 27.4,50.57 | 27.4,50.57 33.78,56.95 U1.1 | v23.94,47.11 23.18,47.11 22.35,46.28 22.35,46.03 U2.12 | 103.25,18.41 98.3,18.41 93.6,13.71 89.47,13.71 87.06,11.29 63.37,11.29 32.64,42.03 v32.64,45.33 | 27.4,50.57 v29.97,48
  Bottom 0.15: v107.82,13.84 107.82,13.2 v108.08,12.95 | v23.94,47.11 v24.83,48 | v29.97,48 v32.64,45.33
GDR
  Top 0.15: 68.64,13.2 64.33,13.2 R4.2 | 68.64,13.2 72.33,13.2 73.66,11.87 86.36,11.87 89.09,14.6 89.09,14.98 J1.2 | 68.64,13.2 68.64,26.34 Q3.1
GND  (via drill 0.3)
  Top 0.15: MCP73831.2 136.65,49.14 136.4,49.14 133.99,46.73 129.29,46.73 C1_BAT.2 129.22,46.73 127.25,46.73 125.22,48.76 121.67,48.76 121.41,48.51 121.41,47.55 121.22,47.36 120.21,47.36 | 120.21,47.36 120.21,46.92 124.46,42.66 C1_BAT2.2 124.46,42.6 123.83,41.97 123.83,40.89 125.16,39.55 126.49,39.55 R1_PWRUSB.1 126.56,39.49 126.75,39.49 127.38,38.85 131.7,38.85 134.11,41.27 138.75,41.27 139.38,41.9 139.38,42.85 138.68,43.55 C1_BAT1.2 138.68,43.68 138.68,44.38 140.97,46.66 140.97,47.74 | 120.21,47.36 120.21,48.57 120.9,49.27 120.9,52 R2_BAT.1 | IC4.2 128.65,42.28 134.56,42.28 135.06,42.79 C3.- 135.13,42.85 135.25,42.85 139.57,47.17 139.57,47.62 139.7,47.74 140.97,47.74 | U4.9 142.94,53.9 142.24,53.2 141.92,53.2 U4.4 141.86,53.14 140.97,52.25 140.97,47.74 | U4.9 143,53.9 143.19,53.71 143.83,53.71 U4.6 143.89,53.65 144.21,53.65 147.19,50.66 151.64,50.66 C5_USB.2 151.7,50.66 152.21,50.66 159.38,57.84 163.39,57.84 J2.B1 163.45,57.97 163.45,58.16 J2.A12 163.45,58.22 163.45,59.43 163.96,59.94 J2.MP4 164.02,60 167.89,60 J2.MP2 167.89,59.94 167.89,49.84 J2.MP1 167.89,49.78 166.43,49.78 | U4.9 142.94,53.97 142.24,54.67 141.92,54.67 U4.1 141.86,54.73 140.21,56.38 137.35,56.38 C2_BAT.2 | 157.92,4.82 159.38,4.82 C1.2 159.51,4.75 159.51,4.5 160.15,3.87 160.15,3.04 159.83,2.72 136.84,2.72 126.3,13.26 D6.1 126.24,13.26 123.89,13.26 123.32,12.69 121.86,12.69 121.22,13.33 D8.1 121.16,13.33 117.28,13.33 116.65,12.69 115.25,12.69 114.62,13.33 D9.1 114.55,13.39 111.7,13.39 111,14.09 109.73,14.09 109.03,13.39 D10.1 108.9,13.39 106.36,13.39 105.66,14.09 104.08,14.09 103.38,13.39 D11.1 103.31,13.39 100.46,13.39 99.76,14.09 98.49,14.09 97.79,13.39 D12.1 97.66,13.33 96.84,12.5 90.68,12.5 J1.MP1 90.61,12.56 v90.61,13.26
  Top 0.15: 157.92,4.82 156.84,4.82 C2.2 | 157.92,10.72 157.35,10.72 156.91,11.17 156.91,11.42 SENSOR2.7 156.78,11.49 156.78,12.5 156.08,13.2 156.08,14.34 SENSOR2.1 | 157.92,10.72 158.43,11.23 158.43,11.42 SENSOR2.5 165.25,18.24 165.25,18.26 | 157.92,10.72 157.92,4.82 | J2.B12 163.45,51.81 163.45,51.55 J2.A1 163.45,51.49 163.45,50.28 163.96,49.78 J2.MP3 | 166.43,49.78 164.02,49.78 J2.MP3 | C4_USB.2 158.56,53.59 158.56,53.4 159.19,52.76 159.19,51.87 157.67,50.35 156.97,50.35 D1.5 156.91,50.28 155.83,50.28 155.57,50.03 155.57,48 R2-USB1.1 155.57,47.93 156.27,47.24 156.27,46.98 R2-USB.2 156.34,47.24 157.23,47.24 160.27,50.28 163.39,50.28 J2.MP3 | 86.17,15.8 86.17,18.15 87.82,19.8 87.82,20.25 86.81,21.27 EPD_C1.1 86.74,21.39 84.9,21.39 EPD_C2.1 | 86.17,15.8 86.17,15.04 J1.8 | v80.01,12.95 79.57,12.5 77.15,12.5 J1.MP2 | v81.28,14.22 81.6,14.53 81.6,14.98 J1.17 | v71.06,12.5 63.75,12.5 R4.1 63.75,12.56 58.74,17.58 58.74,34.16 61.78,37.2 72.71,37.2 R2.1 72.77,37.2 72.96,37.2 73.66,36.51 74.49,36.51 75.22,37.23 | v85.6,15.8 86.17,15.8 | C8.2 91.63,51.81 93.22,51.81 94.04,52.63 C10_SUPERCAP.1 93.85,52.38 95,51.24 95,49.65 92.14,46.79 87.12,46.79 85.6,48.32 85.53,48.32 | 76.55,38.57 77.28,39.3 77.28,40.06 77.98,40.76 C7.2 78.04,40.82 85.53,48.32 | 76.55,38.57 75.22,37.23 | 76.55,38.57 81.72,33.39 87.95,33.39 D3.1 | 50.01,37.87 50.35,38.22 74.23,38.22 75.22,37.23 | 50.01,37.87 45.66,33.52 45.66,33.33 SJ1.1 | 85.53,48.32 85.53,50.92 U3.13 | 34.67,53.2 35.81,53.2 37.66,55.05 U1.9 | 34.67,53.2 33.85,53.2 U1.4 | U2.29_1 12.83,52 12.83,53.2 U2.29_2 | U2.29_4 14.03,52 12.89,52 U2.29_1
  Top 0.15: U2.29_7 15.3,52 14.1,52 U2.29_4 | U2.29_4 14.1,52.06 14.1,53.2 U2.29_5 14.16,53.2 15.3,53.2 U2.29_8 | U2.1 8.38,46.03 8.38,48.7 11.62,51.94 12.76,51.94 U2.29_1 | v16.07,53.33 15.43,53.33 15.37,53.27 U2.29_8 | v34.67,53.33 34.67,53.2 | U2.29_8 15.43,53.4 15.3,53.52 15.3,54.41 U2.29_9 15.3,54.54 14.1,54.54 U2.29_6 14.03,54.54 12.83,54.54 U2.29_3 12.83,54.6 8.38,59.05 8.38,63.43 U2.28 8.32,63.56 8.32,66.48 1.71,73.08 1.71,82.35 J4.G3 1.71,82.42 1.71,89.08 5.27,92.64 J4.P6 | C6.2 68.26,108.77 68.26,108.51 68.9,107.88 68.9,107.05 68.77,106.93 66.86,106.93 65.79,108 BOOT_BUTTON.2 65.72,108 62.29,108 BOOT_BUTTON.1 62.23,107.94 62.04,107.94 55.69,101.59 52.83,101.59 C_DELAY.2 52.77,101.59 52.58,101.78 50.55,101.78 50.42,101.66 50.42,101.34 48.45,99.37 48.32,99.37 IC1.3 48.26,99.37 48.13,99.37 46.55,100.96 46.55,106.8 | C10.2 53.34,108.58 54.04,107.88 54.04,107.05 53.91,106.93 51.82,106.93 50.8,107.94 CHANGE_BUTTON.2 50.74,108 47.31,108 CHANGE_BUTTON.1 47.24,107.94 46.55,107.24 46.55,106.8 | C9.2 4.25,100.07 4.25,96.96 2.86,95.56 J4.G4 2.86,95.5 2.86,95.11 5.27,92.7 5.4,92.7 J4.P6 | C5.2 27.43,108.83 26.73,108.83 25.91,108 RESET_BUTTON.2 | RESET_BUTTON.2 25.84,108 22.42,108 RESET_BUTTON.1 22.35,107.94 22.35,97.34 16.07,91.05 J4.G2 | 16.83,85.34 21.46,85.34 TP5.TP 21.53,85.27 25.27,85.27 TP4.TP | 16.83,85.34 16,85.34 J4.G1 | 16.83,85.34 16.83,89.15 16.07,89.91 16.07,90.99 J4.G2 | J4.P6 5.46,92.64 14.29,92.64 15.94,90.99 J4.G2 | v46.1,106.8 46.55,106.8 | v27.05,106.8 25.91,107.94 RESET_BUTTON.2 | v42.55,45.33 50.01,37.87 | 165.25,18.26 J3.1
  Top 0.15: 165.25,18.26 165.75,18.76 166.03,18.76 166.38,19.11 166.38,21.76 165.62,21.76 165.62,23.36 166.43,23.36 166.43,49.78
  Bottom 0.15: v71.06,12.5 79.5,12.5 79.95,12.95 v80.01,12.95 v81.28,14.22 81.34,14.22 81.72,14.6 83.69,14.6 84.9,15.8 v85.6,15.8 88.08,15.8 v90.61,13.26 | v16.07,53.33 v34.67,53.33 34.61,53.27 v42.55,45.33 | v27.05,106.8 v46.1,106.8
I2C_PW  (via drill 0.3)
  Top 0.15: C1.1 159.38,3.48 156.84,3.48 C2.1 156.78,3.55 155.77,3.55 154.69,4.63 154.43,4.63 R1_PINH.2 | R2-PINH.2 151.45,4.63 154.31,4.63 R1_PINH.2 | 155.57,14.6 155.57,14.91 155.77,15.11 156.34,15.11 156.84,14.6 156.84,14.41 SENSOR2.2 156.91,14.34 156.91,13.33 157.61,12.63 157.61,11.49 SENSOR2.6 | 155.57,14.6 155.57,13.26 156.02,12.82 156.02,11.49 SENSOR2.8 156.02,11.42 154.69,10.09 154.69,4.69 R1_PINH.2 | v35.62,55.94 35.62,56.13 32.45,59.3 26.23,59.3 22.35,63.17 22.35,63.43 U2.17 | 155.57,14.6 v115.57,14.6
  Bottom 0.15: v35.62,55.94 43.05,55.94 71.75,27.23 71.75,26.6 79.38,18.98 111.19,18.98 v115.57,14.6
INT_RTC  (via drill 0.3)
  Top 0.15: 87.88,61.71 87.88,61.59 86.87,60.57 86.87,60.32 U3.3 86.87,60.19 86.87,59.94 85.79,58.86 v84.52,58.86 | 87.88,61.71 87.88,62.54 R1_PINH1.1 | v29.84,58.86 17.27,46.28 17.27,46.03 U2.8 | v109.28,64.19 125.6,64.19 TP15.TP | 87.88,61.71 v88.65,61.71
  Bottom 0.15: v84.52,58.86 v29.84,58.86 | v109.28,64.19 91.12,64.19 v88.65,61.71
IO/BOOT
  Top 0.15: R_BOOT.1 60.33,107.37 60.33,107.5 61.34,108.51 61.34,108.64 62.23,109.53 BOOT_BUTTON.4 62.29,109.53 65.72,109.53 BOOT_BUTTON.3 65.79,109.53 66.77,108.55 | 66.77,108.55 67.82,107.5 68.2,107.5 C6.1 | 66.77,108.55 67.56,109.34 68.77,109.34 69.22,108.89 69.22,106.93 25.78,63.49 24.89,63.49 U2.15
IO/CHANGE
  Top 0.15: C10.1 53.34,107.5 52.83,107.5 51.56,108.77 48.01,108.77 47.31,109.47 CHANGE_BUTTON.4 47.24,109.47 45.72,107.94 R_CHANGE.1 45.66,107.88 45.66,91.69 21.97,68 18.92,68 14.73,63.81 14.73,63.49 U2.23
MISO  (via drill 0.3)
  Top 0.15: v15.05,93.72 5.65,93.72 J4.P7 | v21.08,93.72 21.97,93.72 22.35,93.34 TP6.TP | v125.03,15.04 120.71,19.36 R5.1 | v127,14.09 127.76,13.33 D6.2 | v32.96,55.49 33.15,55.68 33.78,55.68 U1.2 | v18.61,55.49 17.34,55.49 9.65,63.17 9.65,63.43 U2.27 9.65,63.56 9.97,63.87 v9.97,64.64
  Bottom 0.15: v21.08,93.72 v15.05,93.72 15.05,83.81 9.97,78.73 v9.97,64.64 | v127,14.09 126.05,15.04 v125.03,15.04 123.89,15.04 120.9,12.06 87.19,12.06 87.06,12.18 71.37,12.18 71.25,12.06 70.87,12.06 67.25,15.68 67.25,30.22 47.62,49.84 47.62,50.47 42.93,55.17 33.34,55.17 33.02,55.49 v32.96,55.49 v18.61,55.49
MOSI  (via drill 0.3)
  Top 0.15: v83.57,14.15 83.12,14.6 83.12,14.98 J1.14 | D9.2 116.08,13.39 115.19,14.28 v115.06,14.28 115.06,14.34 114.87,14.53 114.87,19.36 R6.1 | v34.54,52.7 39.5,52.7 39.94,53.14 41.53,53.14 U1.5 41.66,53.14 v42.23,52.57 | v13.78,81.91 6.35,89.34 5.65,89.34 J4.P3 | v21.46,56.51 21.46,55.55 23.05,53.97 23.05,53.4 22.42,52.76 v22.42,52.7 16,46.28 16,46.03 U2.7 16,45.97 16,44.19 23.3,36.89 23.3,34.35 TP7.TP | v86.87,11.74 v87.63,12.5
  Bottom 0.15: 87.63,14.15 89.09,14.15 90.42,12.82 100.9,12.82 101.03,12.95 106.3,12.95 107.63,14.28 v115.06,14.28 | 87.63,14.15 v83.57,14.15 | v22.42,52.7 v34.54,52.7 | v13.78,81.91 13.78,64.19 v21.46,56.51 | v87.63,12.5 87.63,14.15 | v86.87,11.74 70.74,11.74 66.93,15.55 66.93,30.09 47.31,49.71 47.31,50.35 45.09,52.57 v42.23,52.57
N$1
  Top 0.15: R2-USB1.2 156.91,48 157.23,48 162.81,53.59 163.39,53.59 J2.A5 163.45,53.65 164.02,53.65 164.53,54.16 164.53,55.55 164.02,56.06 163.45,56.06 J2.A8
N$2
  Top 0.15: R2-USB.1 155,46.98 155,47.3 152.97,49.33 152.97,50.98 158.56,56.57 163.39,56.57 J2.B5
N$3
  Top 0.15: R1.1 19.81,41.52 19.81,41.71 19.18,42.35 19.18,45.4 19.75,45.97 U2.10
N$5
  Top 0.15: 127.95,41.14 128.4,41.14 128.59,41.33 IC4.3 128.65,41.39 130.37,41.39 130.87,41.9 133.54,41.9 133.86,41.58 136.33,41.58 137.92,43.17 137.99,43.17 | 127.95,41.14 D2.1 | 127.95,41.14 127.95,42.73 128.46,43.24 128.59,43.24 IC4.1 | 137.99,43.17 138.62,42.54 138.62,42.35 C1_BAT1.1 | 137.99,43.17 137.99,44.82 140.21,47.05 Q1.2
N$6
  pour Top: 69.24,110.44 69.22,110.42 18.98,110.42 18.96,110.44 18.94,110.46 18.92,110.48 18.92,111.22 0.08,111.22 0.08,0.08 74.72,0.08 74.72,10.22 74.74,10.24 74.76,10.26 74.78,10.28 93.02,10.28 93.04,10.26 93.06,10.24 93.08,10.22 93.08,0.18 170.02,0.18 170.02,67.22 92.18,67.22 92.16,67.24 92.14,67.26 92.12,67.28 92.12,111.22 69.28,111.22 69.28,110.48 69.26,110.46
N$7
  Top 0.15: CHG_LED.C 130.56,52.19 124.65,52.19 120.84,48.38 120.84,48.06 R1_BAT.1
N$8  (via drill 0.3)
  Top 0.15: C4.1 70.74,44.89 70.74,42.28 68.83,40.38 D4.1 68.96,40.44 v69.72,39.68 | v83,36.38 86.61,36.38 89.6,33.39 91.44,33.39 D3.2
  Bottom 0.15: v83,36.38 75.25,36.38 71.94,39.68 v69.72,39.68
N$9
  Top 0.15: R1_BAT.2 122.11,48 125.54,48 128.71,44.82 133.29,44.82 136.65,48.19 MCP73831.1
N$10
  Top 0.15: R2_BAT.2 122.24,52.06 124.08,52.06 124.9,52.89 131.06,52.89 131.44,52.51 131.44,50.66 133.86,48.25 134.05,48.25 MCP73831.5
N$11
  Top 0.15: J1.4 88.08,15.04 88.08,19.61 88.14,19.68 88.14,21.27 86.81,22.6 EPD_C1.2
N$12  (via drill 0.3)
  Top 0.15: v87.63,17.2 87.63,15.04 J1.5 | v88.52,18.09 88.52,21.96 87.25,23.23 85.41,23.23 84.9,22.73 EPD_C2.2
  Bottom 0.15: v88.52,18.09 v87.63,17.2
N$13
  Top 0.15: IC1.5 51.12,101.21 51.82,101.21 52.77,100.26 C_DELAY.1
N$14
  Top 0.15: D7.1 89.28,64.13 89.66,64.13 92.84,60.95 R_CAPACITOR.1
N$15
  Top 0.15: J1.24 78.11,15.04 78.11,17.45 74.74,20.82 74.74,21.84 75.44,22.54 EPD_C12.2
N$16
  Top 0.15: J1.22 79.06,15.04 79.06,19.11 77.34,20.82 77.34,21.9 77.98,22.54 EPD_C10.2
N$17
  Top 0.15: J1.21 79.57,14.98 79.57,14.6 79.31,14.34 78.93,14.34 78.68,14.6 78.68,14.98 J1.23 78.61,15.04 78.61,19.11 76.52,21.2 76.52,21.33 EPD_C9.1 76.52,21.45 76.52,21.58 77.34,22.41 77.34,22.98 77.47,23.11 78.61,23.11 79.06,22.66 79.06,22.41 EPD_C11.2
N$18  (via drill 0.3)
  Top 0.15: v80.07,20.69 80.07,15.04 J1.20 | v79.31,23.11 79.76,23.11 80.14,22.73 EPD_C8.2
  Bottom 0.15: v80.07,20.69 80.07,22.34 v79.31,23.11
N$19
  Top 0.15: J1.19 80.64,15.04 80.64,19.74 81.85,20.95 81.85,22.03 81.22,22.66 EPD_C7.2
N$20  (via drill 0.3)
  Top 0.15: v82.23,20.69 81.15,19.61 81.15,15.04 J1.18 | v82.23,23.42 82.23,23.23 82.74,22.73 EPD_C6.2
  Bottom 0.15: v82.23,23.42 v82.23,20.69
N$21
  pour Bottom: 69.24,110.44 69.22,110.42 18.98,110.42 18.96,110.44 18.94,110.46 18.92,110.48 18.92,111.22 0.08,111.22 0.08,0.08 74.72,0.08 74.72,10.22 74.74,10.24 74.76,10.26 74.78,10.28 93.02,10.28 93.04,10.26 93.06,10.24 93.08,10.22 93.08,0.18 170.02,0.18 170.02,67.22 92.18,67.22 92.16,67.24 92.14,67.26 92.12,67.28 92.12,111.22 69.28,111.22 69.28,110.48 69.26,110.46
PREVGL  (via drill 0.3)
  Top 0.15: 80.71,21.45 81.15,21.45 EPD_C7.1 | 80.71,21.45 80.2,21.45 EPD_C8.1 80.07,21.39 79.38,21.39 79.12,21.14 EPD_C11.1 79.06,21.14 78.11,21.14 78.04,21.2 EPD_C10.1 | EPD_C5.1 83.82,21.27 83.69,21.39 82.8,21.39 EPD_C6.1 82.74,21.45 82.74,21.64 81.85,22.54 81.85,23.17 81.47,23.55 76.39,23.55 76.26,23.42 v76.2,23.42 76.2,22.98 76.45,22.73 EPD_C9.2 76.45,22.66 76.45,22.41 76.01,21.96 75.95,21.96 75.5,21.52 75.5,21.27 EPD_C12.1 | v72.33,38.66 72.33,40.31 D4.2 | v80.71,20.69 80.71,21.45
  Bottom 0.15: v72.33,38.66 72.33,27.3 v76.2,23.42 76.26,23.42 76.39,23.55 79.5,23.55 80.71,22.34 v80.71,20.69
RESE
  Top 0.15: J1.3 88.58,14.98 88.58,14.6 87.38,13.39 72.58,13.39 72.2,13.77 71.94,13.77 R3.2 71.88,13.84 69.91,15.8 69.91,26.34 Q3.2
RESE'
  Top 0.15: R3.1 71.88,12.44 71.63,12.44 71.06,11.87 63.25,11.87 47.18,27.93 47.18,33.27 SJ1.2 47.24,33.27 51.88,37.9 73.22,37.9 73.85,37.27 74.04,37.27 R2.2
RESET  (via drill 0.3)
  Top 0.15: R_RESET.1 20.13,107.24 21.46,108.58 21.46,108.64 22.35,109.53 RESET_BUTTON.4 22.42,109.53 25.84,109.53 RESET_BUTTON.3 25.91,109.47 28,109.47 28.19,109.28 28.19,108.45 | 28.19,108.45 27.5,107.75 C5.1 | v46.99,101.28 48.26,101.28 IC1.1 | v35.43,101.28 28.26,108.45 28.19,108.45 | v10.86,50.54 10.86,46.03 U2.3
  Bottom 0.15: v46.99,101.28 v35.43,101.28 19.81,101.28 6.29,87.75 6.29,66.73 10.86,62.16 v10.86,50.54
RTC_RST  (via drill 0.3)
  Top 0.15: v25.15,61.65 23.62,63.17 23.62,63.43 U2.16 | v84.52,61.65 85.53,60.63 85.53,60.32 U3.4
  Bottom 0.15: v84.52,61.65 v25.15,61.65
RX
  Top 0.15: U2.24 13.46,63.49 13.46,63.81 18.86,69.21 21.4,69.21 TP2.TP
SCK  (via drill 0.3)
  Top 0.15: v83.19,19.42 83.57,19.04 83.57,15.04 J1.13 | v108.33,19.42 109.03,19.42 R7.1 | v121.92,14.15 122.68,13.39 D8.2 | J4.P5 5.65,91.56 6.16,91.05 6.22,91.05 14.22,83.05 14.22,73.33 TP8.TP 14.22,73.27 14.22,70.79 v13.34,69.91 | v39.75,54.41 41.53,54.41 U1.6 41.66,54.41 44.01,52.06 v47.56,52.06 | v22.61,53.78 15.81,46.98 15.43,46.98 14.73,46.28 14.73,46.03 U2.6
  Bottom 0.15: 86.87,19.42 v108.33,19.42 111.38,19.42 116.65,14.15 v121.92,14.15 | 86.87,19.42 v83.19,19.42 | v39.75,54.41 23.24,54.41 v22.61,53.78 19.68,53.78 13.34,60.13 v13.34,69.91 | 86.87,19.42 86.87,37.65 72.45,52.06 v47.56,52.06
SCL  (via drill 0.3)
  Top 0.15: v153.54,3.29 151.45,3.29 R2-PINH.1 | v158.05,13.52 158.05,13.77 158.43,14.15 158.43,14.34 SENSOR2.4 | v144.65,54.16 143.89,54.16 U4.7 | v151.19,48.25 151.19,35.3 164.75,21.74 164.27,21.26 | 164.27,21.26 v164.21,21.2 | v20.57,61.14 18.54,63.17 18.54,63.43 U2.20 | v89.09,52.38 89.09,51.24 89.34,50.98 U3.16 | 164.27,21.26 J3.4
  Bottom 0.15: v153.54,3.29 154.75,3.29 155,3.04 155.38,3.04 158.05,5.71 v158.05,13.52 158.05,15.04 v164.21,21.2 | v151.19,48.25 151.19,48.7 145.73,54.16 v144.65,54.16 121.54,54.16 119.76,52.38 v89.09,52.38 51.05,52.38 47.05,56.38 29.34,56.38 24.57,61.14 v20.57,61.14
SDA  (via drill 0.3)
  Top 0.15: v155.19,3.48 155.07,3.36 154.37,3.36 R1_PINH.1 | v157.42,13.45 157.42,14.15 157.61,14.34 SENSOR2.3 157.67,14.41 157.67,15.16 162.27,19.76 162.65,19.76 J3.3 | 96.11,60.03 88.14,52.06 88.14,50.98 U3.15 | 96.11,60.03 101.85,65.78 138.49,65.78 143.83,60.44 143.83,54.73 U4.8 143.89,54.6 144.84,54.6 145.54,53.9 v145.54,53.71 | v26.1,64.44 20.45,64.44 19.81,63.81 19.81,63.49 U2.19 | v90.11,64.44 91.69,64.44 96.11,60.03
  Bottom 0.15: v155.19,3.48 155.19,11.23 v157.42,13.45 157.42,41.39 145.54,53.27 v145.54,53.71 | v90.11,64.44 v26.1,64.44
SRC  (via drill 0.3)
  Top 0.15: v69.34,38.66 72.01,41.33 72.01,44.89 C4.2 | v66.04,35.36 66.04,33.59 L1.1 66.2,33.52 65.22,33.52 69.22,29.52 69.22,28.5 Q3.3 | v86.42,37.46 D5.2
  Bottom 0.15: v66.04,35.36 v69.34,38.66 69.28,38.66 69.28,39.87 69.53,40.12 71.94,40.12 74.61,37.46 v86.42,37.46
SS_SD  (via drill 0.3)
  Top 0.15: v126.43,18.03 126.43,19.36 R10.1 | v101.22,12.5 100.08,12.5 99.25,13.33 D12.2 99.19,13.33 v97.28,11.42 | v12.13,51.36 12.13,46.03 U2.4 | v12.13,80.26 12.13,82.16 6.03,88.26 J4.P2
  Bottom 0.15: v126.43,18.03 120.9,12.5 v101.22,12.5 | v12.13,80.26 v12.13,51.36 12.13,46.03 46.86,11.29 87.06,11.29 87.19,11.42 v97.28,11.42
TX
  Top 0.15: U2.25 12.19,63.49 12.19,66.92 14.48,69.21 TP1.TP
USB_D+  (via drill 0.3)
  Top 0.15: v156.02,49.84 156.46,49.4 156.91,49.4 D1.4 | v80.01,53.71 51.5,53.71 43.88,46.09 24.96,46.09 24.89,46.03 U2.14
  Bottom 0.15: v156.02,49.84 156.02,50.66 156.4,51.05 156.4,54.54 146.3,64.64 90.93,64.64 v80.01,53.71
USB_D-  (via drill 0.3)
  Top 0.15: v155.96,51.24 156.91,51.24 D1.6 | v121.35,55.24 v121.98,54.6 | v51.24,52.82 51.05,52.82 44.01,45.78 26.16,45.78 25.4,45.01 24.32,45.01 23.62,45.71 23.62,45.97 U2.13
  Bottom 0.15: v155.96,51.24 149.1,51.24 145.73,54.6 v121.98,54.6 | v121.35,55.24 86.87,55.24 84.45,52.82 v51.24,52.82
VBAT
  Top 0.127: R1_PWRUSB.2 127.76,39.55 127.57,39.55 126.62,40.51 126.05,40.51 125.86,40.7 125.86,42.54 D2.2 127.57,43.24 128.84,44.51 135.64,44.51 138.24,47.11 Q1.1 138.3,47.11 138.3,48.76 136.97,50.09 136.72,50.09 MCP73831.3 136.65,50.16 136.65,53.71 | U4.2 141.92,54.16 141.92,53.71 U4.3 141.86,53.71 136.65,53.71 | 136.68,56.86 136.65,56.83 136.65,53.71 | 136.68,56.86 137.29,57.46 137.29,57.65 C2_BAT.1 | 136.68,56.86 134.37,59.17 118.43,59.17 TP3.TP
VBUS  (via drill 0.3)
  Top 0.127: C4_USB.1 158.5,52.32 156.4,52.32 155.32,51.24 155.32,50.92 154.75,50.35 154.5,50.35 D1.2 154.43,50.28 154.18,50.28 v153.42,49.52 | 152.37,48.47 156.53,44.31 156.66,44.31 PFMF.050.1.2 | 152.37,48.47 151.7,49.14 151.7,49.27 C5_USB.1 151.64,49.33 v141.41,49.33 | v152.4,48.51 152.37,48.47 | v130.11,46.28 129.29,45.46 C1_BAT.1 | v133.29,49.46 133.99,50.16 MCP73831.4 134.05,50.16 132.14,52.06 132.14,52.19 CHG_LED.A 131.13,53.2 122.68,53.2 117.16,58.73 117.16,59.68 117.92,60.44 123.64,60.44 127.38,64.19 131.95,64.19 TP14.TP
  Bottom 0.127: v152.4,48.51 v153.42,49.52 | v130.11,46.28 v133.29,49.46 133.22,49.33 v141.41,49.33
VRTC
  Top 0.15: C10_SUPERCAP.2 94.04,50.47 91.63,50.47 C8.1 91.57,50.41 90.42,50.41 89.72,49.71 87.76,49.71 86.87,50.6 86.87,50.92 U3.14 86.87,50.98 86.87,51.3 93.53,57.97 93.53,61.33 92.9,61.97 92.9,62.16 R_CAPACITOR.2
VUSB  (via drill 0.3)
  Top 0.127: J2.A9 163.45,57.4 163.45,57.14 J2.B4 163.51,57.14 163.89,57.14 164.85,56.19 164.85,53.52 163.89,52.57 163.51,52.57 J2.B9 163.45,52.57 163.45,52.32 J2.A4 163.39,52.25 v162.12,52.25 | v154.69,44.82 152.72,44.82 152.21,44.31 PFMF.050.1.1
  Bottom 0.127: v154.69,44.82 v162.12,52.25